# EAGLE board Lynx Keyboard 20240103 (EAGLE 7.5.0)
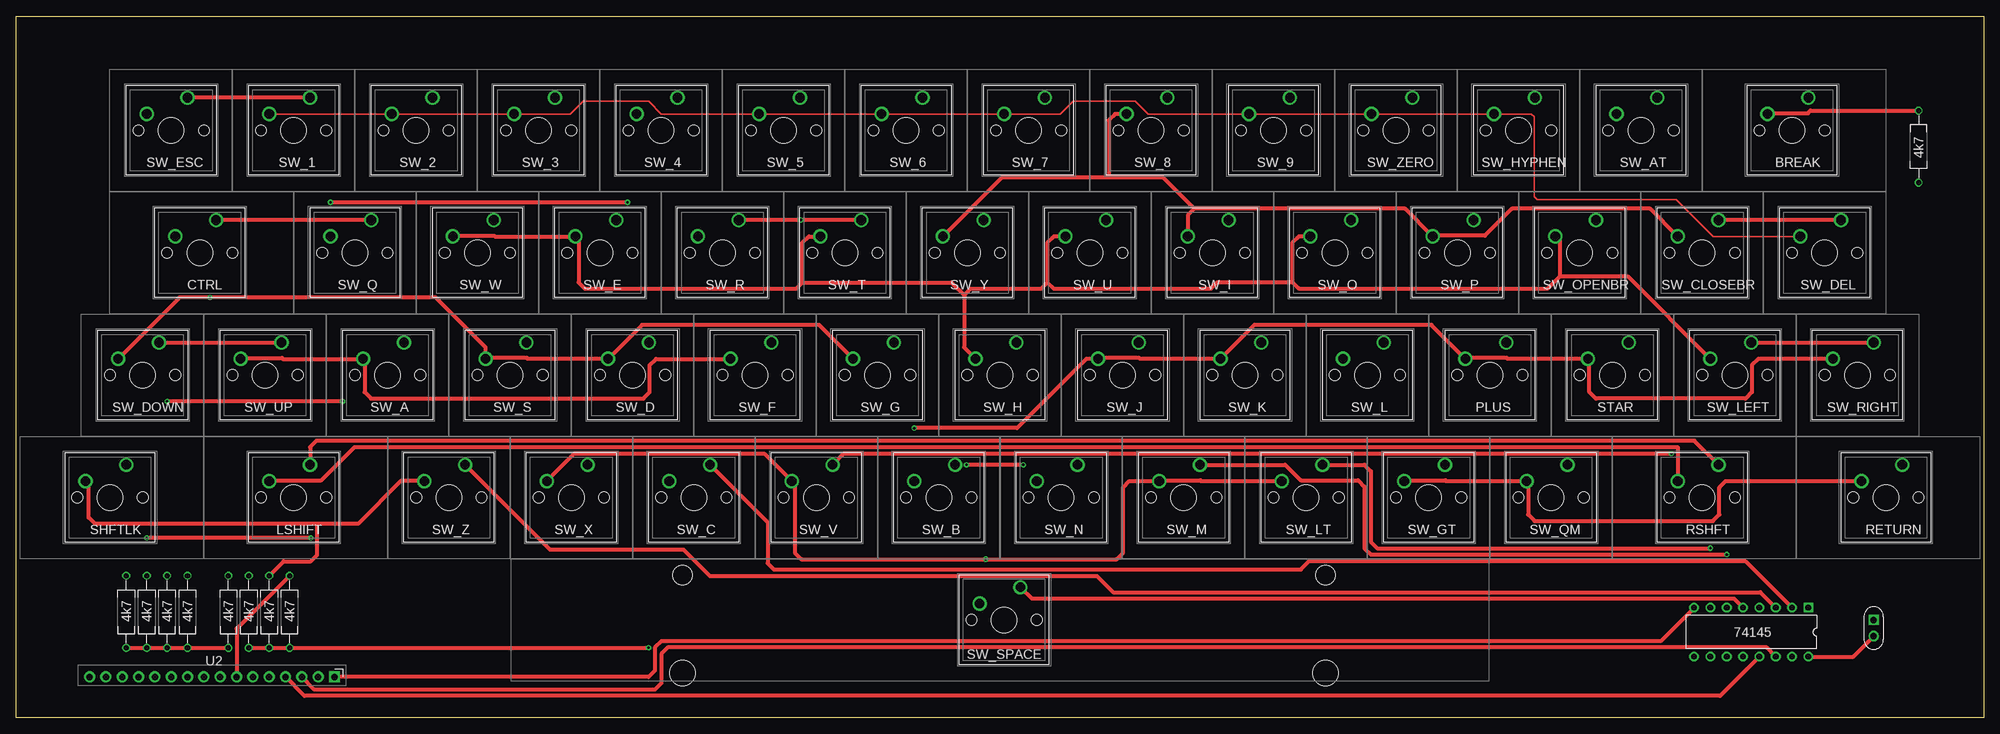
[diagram p0: board, top side]
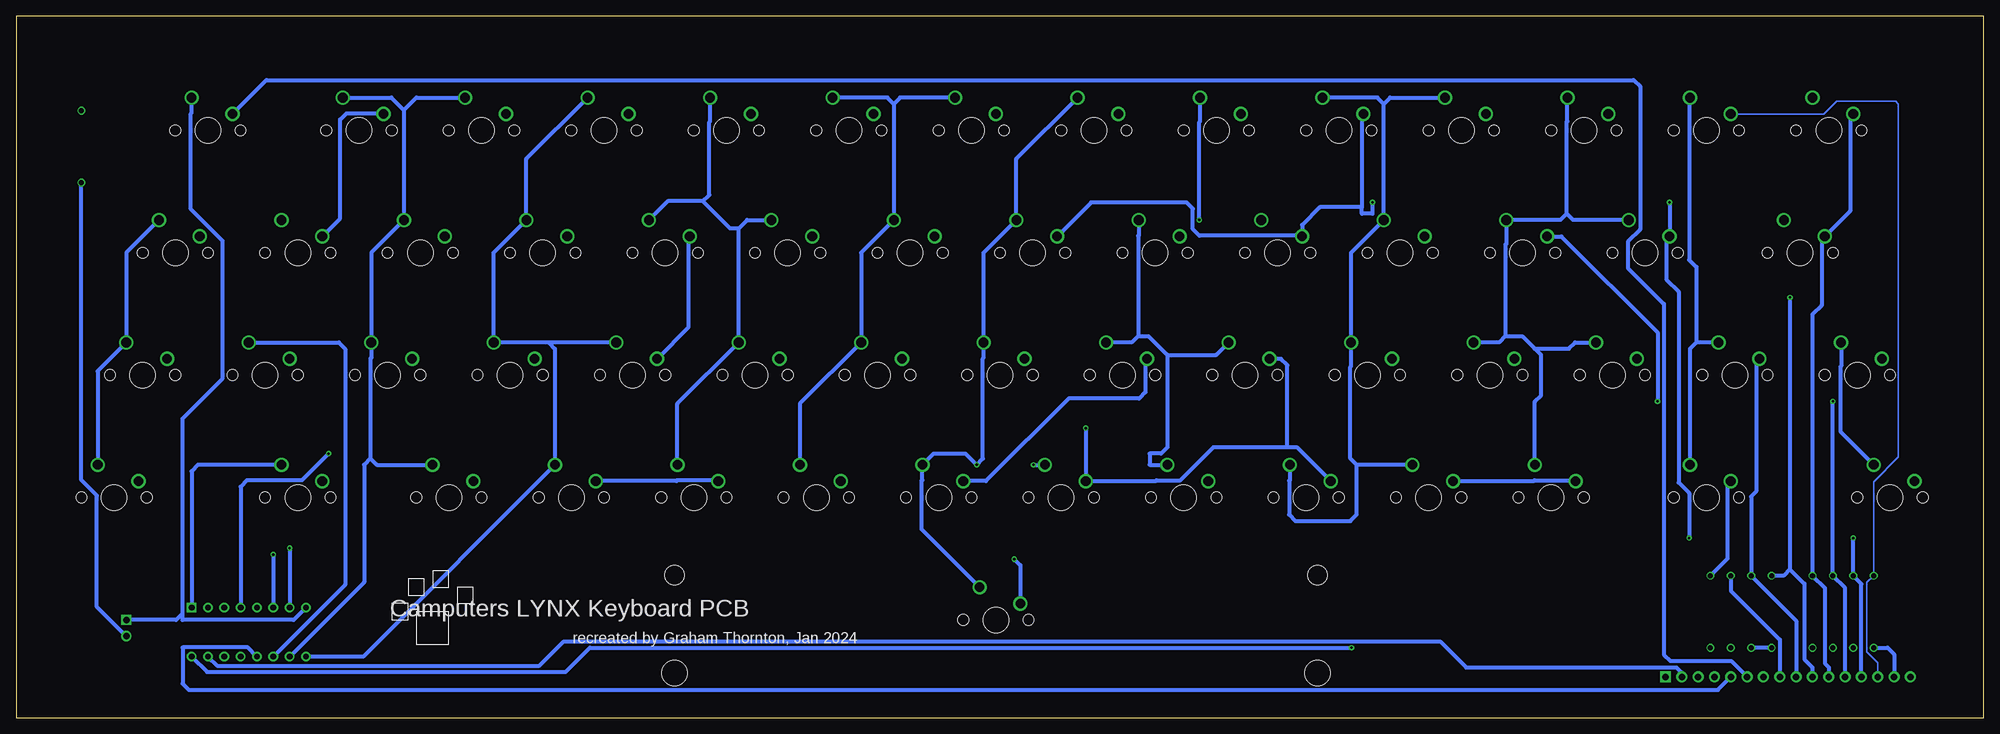
[diagram p1: board, bottom side, seen from below]

Size 306.07 x 109.22 mm. Coordinates in mm from the lower left corner, seen from the top.
Outline: 0,109.22 306.07,109.22 306.07,0 0,0 0,109.22
Copper layers (1*16): F.Cu 0.035mm / dielectric 1.5mm / B.Cu 0.035mm
Design rules "default *": minimum track width 10mil, minimum drill 0.61mm, track to track 8mil, track to pad 8mil, pad to pad 8mil, via to via 8mil, smd to smd 8mil, copper to edge 40mil, drill to drill 8mil, minimum pad ring 0mil, minimum via ring 8mil, stop-mask expansion 2mil, vias tented up to drill 19mil, thermal gap 10mil
Net classes: 0 Default: width 0.66 mm, clearance 0.33 mm, clearance 0.33 mm to class 1; 1 Default KiCad: width 0.25 mm, clearance 0.2 mm, clearance 0.2 mm to class 0

## Footprints (pad centres in the part's own frame; a part is rotated, then mirrored left to right if it is on the bottom)
DIP-16 = drill 0.9 pad 1.5 square: 1 -3.81,8.89 | drill 0.9 pad 1.5: 2 -3.81,6.35; 3 -3.81,3.81; 4 -3.81,1.27; 5 -3.81,-1.27; 6 -3.81,-3.81; 7 -3.81,-6.35; 8 -3.81,-8.89; 9 3.81,-8.89; 10 3.81,-6.35; 11 3.81,-3.81; 12 3.81,-1.27; 13 3.81,1.27; 14 3.81,3.81; 15 3.81,6.35; 16 3.81,8.89
P1 = drill 1.5 pad 2.2: 1 2.222,5.08; 2 -4.128,2.54 | hole 4: -0.317,0 | hole 1.7: -5.398,0; 4.763,0
CAP-2.54/6.6x3 = drill 1 pad 1.6 square: 1 -1.27,0 | drill 1 pad 1.6: 2 1.27,0
P0 = drill 1.5 pad 2.2: 1 0,0; 2 -6.35,-2.54 | hole 4: -2.54,-5.08 | hole 1.7: -7.62,-5.08; 2.54,-5.08
RESAD1120W55L680D260 = drill 0.8 pad 1.2: 1 -5.6,0; 2 5.6,0
P53 = drill 1.5 pad 2.2: 1 3.175,5.438; 2 -3.175,2.898 | hole 4: 0.635,0.357; 50.635,-7.883; -49.365,-7.883 | hole 1.7: -4.445,0.357; 5.715,0.357 | hole 3.05: -49.365,7.357; 50.635,7.357
P68 = drill 1 pad 1.7 square: 1 19.05,-0.212 | drill 1 pad 1.7: 2 16.51,-0.212; 3 13.97,-0.212; 4 11.43,-0.212; 5 8.89,-0.212; 6 6.35,-0.212; 7 3.81,-0.212; 8 1.27,-0.212; 9 -1.27,-0.212; 10 -3.81,-0.212; 11 -6.35,-0.212; 12 -8.89,-0.212; 13 -11.43,-0.212; 14 -13.97,-0.212; 15 -16.51,-0.212; 16 -19.05,-0.212

## Placement (x,y rotation side)
74145  DM74145N  [DIP-16]  269.88,13.34 270 top
BREAK  DEV_BREAK  [P1]  276.54,91.44 0 top
C1  CAP  [CAP-2.54/6.6x3]  288.93,13.97 270 top
CTRL  DEV_CTRL  [P1]  28.89,72.39 0 top
LSHIFT  DEV_LSHIFT  [P1]  43.5,34.29 0 top
PLUS  SW_Push_LED  [P0]  231.78,58.42 0 top
R1  4k7  [RESAD1120W55L680D260]  295.91,88.9 270 top
R2  4k7  [RESAD1120W55L680D260]  20.32,16.51 90 top
R3  4k7  [RESAD1120W55L680D260]  23.5,16.51 90 top
R4  4k7  [RESAD1120W55L680D260]  26.67,16.51 90 top
R5  4k7  [RESAD1120W55L680D260]  33.02,16.51 90 top
R6  4k7  [RESAD1120W55L680D260]  36.2,16.51 90 top
R7  4k7  [RESAD1120W55L680D260]  39.37,16.51 90 top
R8  4k7  [RESAD1120W55L680D260]  42.55,16.51 90 top
R11  4k7  [RESAD1120W55L680D260]  17.14,16.51 90 top
RETURN  DEV_RETURN  [P1]  291.15,34.29 0 top
RSHFT  DEV_RSHFT  [P1]  262.57,34.29 0 top
SHFTLK  DEV_SHFTLK  [P1]  14.92,34.29 0 top
STAR  SW_Push_LED  [P0]  250.82,58.42 0 top
SW_1  SW_Push_LED  [P0]  45.72,96.52 0 top
SW_2  SW_Push_LED  [P0]  64.77,96.52 0 top
SW_3  SW_Push_LED  [P0]  83.82,96.52 0 top
SW_4  SW_Push_LED  [P0]  102.87,96.52 0 top
SW_5  SW_Push_LED  [P0]  121.92,96.52 0 top
SW_6  SW_Push_LED  [P0]  140.97,96.52 0 top
SW_7  SW_Push_LED  [P0]  160.02,96.52 0 top
SW_8  SW_Push_LED  [P0]  179.07,96.52 0 top
SW_9  SW_Push_LED  [P0]  198.12,96.52 0 top
SW_A  SW_Push_LED  [P0]  60.33,58.42 0 top
SW_AT  SW_Push_LED  [P0]  255.27,96.52 0 top
SW_B  SW_Push_LED  [P0]  146.05,39.37 0 top
SW_C  SW_Push_LED  [P0]  107.95,39.37 0 top
SW_CLOSEBR  SW_Push_LED  [P0]  264.8,77.47 0 top
SW_D  SW_Push_LED  [P0]  98.42,58.42 0 top
SW_DEL  SW_Push_LED  [P0]  283.85,77.47 0 top
SW_DOWN  SW_Push_LED  [P0]  22.23,58.42 0 top
SW_E  SW_Push_LED  [P0]  93.34,77.47 0 top
SW_ESC  SW_Push_LED  [P0]  26.67,96.52 0 top
SW_F  SW_Push_LED  [P0]  117.47,58.42 0 top
SW_G  SW_Push_LED  [P0]  136.53,58.42 0 top
SW_GT  SW_Push_LED  [P0]  222.25,39.37 0 top
SW_H  SW_Push_LED  [P0]  155.57,58.42 0 top
SW_HYPHEN  SW_Push_LED  [P0]  236.22,96.52 0 top
SW_I  SW_Push_LED  [P0]  188.59,77.47 0 top
SW_J  SW_Push_LED  [P0]  174.62,58.42 0 top
SW_K  SW_Push_LED  [P0]  193.68,58.42 0 top
SW_L  SW_Push_LED  [P0]  212.72,58.42 0 top
SW_LEFT  SW_Push_LED  [P0]  269.88,58.42 0 top
SW_LT  SW_Push_LED  [P0]  203.2,39.37 0 top
SW_M  SW_Push_LED  [P0]  184.15,39.37 0 top
SW_N  SW_Push_LED  [P0]  165.1,39.37 0 top
SW_O  SW_Push_LED  [P0]  207.65,77.47 0 top
SW_OPENBR  SW_Push_LED  [P0]  245.75,77.47 0 top
SW_P  SW_Push_LED  [P0]  226.69,77.47 0 top
SW_Q  SW_Push_LED  [P0]  55.24,77.47 0 top
SW_QM  SW_Push_LED  [P0]  241.3,39.37 0 top
SW_R  SW_Push_LED  [P0]  112.39,77.47 0 top
SW_RIGHT  SW_Push_LED  [P0]  288.93,58.42 0 top
SW_S  SW_Push_LED  [P0]  79.38,58.42 0 top
SW_SPACE  DEV_SW_SPACE  [P53]  153.03,14.88 0 top
SW_T  SW_Push_LED  [P0]  131.44,77.47 0 top
SW_U  SW_Push_LED  [P0]  169.54,77.47 0 top
SW_UP  SW_Push_LED  [P0]  41.27,58.42 0 top
SW_V  SW_Push_LED  [P0]  127,39.37 0 top
SW_W  SW_Push_LED  [P0]  74.3,77.47 0 top
SW_X  SW_Push_LED  [P0]  88.9,39.37 0 top
SW_Y  SW_Push_LED  [P0]  150.5,77.47 0 top
SW_Z  SW_Push_LED  [P0]  69.85,39.37 0 top
SW_ZERO  SW_Push_LED  [P0]  217.17,96.52 0 top
U2  DEV_U2  [P68]  30.48,6.56 0 top

## Library data of the parts
74145 = common; DATASHEET: http://datasheets.diptrace.com/fairchild/DM74145.pdf; MANUFACTURER: Fairchild
BREAK C1 CTRL LSHIFT PLUS RETURN RSHFT SHFTLK STAR SW_1-SW_9 SW_A SW_AT SW_B SW_C SW_CLOSEBR SW_D SW_DEL SW_DOWN SW_E SW_ESC SW_F SW_G SW_GT SW_H SW_HYPHEN SW_I SW_J SW_K SW_L SW_LEFT SW_LT SW_M SW_N SW_O SW_OPENBR SW_P SW_Q SW_QM SW_R SW_RIGHT SW_S SW_SPACE SW_T SW_U SW_UP SW_V SW_W SW_X SW_Y SW_Z SW_ZERO U2 = common
R1-R8 R11 = common; DATASHEET: http://datasheets.diptrace.com/yageo/cfr.pdf; MANUFACTURER: Yageo; PART_NUMBER_(DIGI-KEY): 1.0KQBK-ND; UNIQUE_NAME: YAGEO_CFR-25

## Nets
key_pin_9 [Default KiCad]: R11.2 SW_1.2 SW_2.2 SW_3.2 SW_5.2 SW_6.2 SW_7.2 SW_9.2 SW_DEL.2 SW_HYPHEN.2 SW_ZERO.2 U2.14
Net_0: 74145.5 SW_6.1 SW_B.1 SW_H.1 SW_N.1 SW_SPACE.1 SW_Y.1
Net_2: R2.2 SW_4.2 SW_8.2 SW_AT.2 SW_CLOSEBR.2 SW_I.2 SW_P.2 SW_Q.2 SW_R.2 SW_Y.2 U2.13
Net_3: 74145.8 BREAK.1 C1.1 U2.1
Net_4: BREAK.2 R1.1 U2.6
Net_5: 74145.15 U2.2
Net_6: 74145.14 U2.3
Net_7: 74145.13 U2.4
Net_8: 74145.12 U2.5
Net_9: LSHIFT.2 R8.2 RSHFT.2 U2.7
Net_10: 74145.1 LSHIFT.1 RSHFT.1 SHFTLK.1 SW_1.1 SW_DOWN.1 SW_ESC.1 SW_UP.1
Net_11: 74145.2 SW_3.1 SW_4.1 SW_C.1 SW_D.1 SW_E.1 SW_X.1
Net_12: 74145.3 CTRL.1 SW_2.1 SW_A.1 SW_Q.1 SW_S.1 SW_W.1 SW_Z.1
Net_13: 74145.4 SW_5.1 SW_F.1 SW_G.1 SW_R.1 SW_T.1 SW_V.1
Net_14: 74145.16 C1.2 R1.2 R2.1 R3.1 R4.1 R5.1 R6.1 R7.1 R8.1 R11.1 U2.15
Net_15: 74145.6 SW_7.1 SW_8.1 SW_J.1 SW_M.1 SW_U.1
Net_16: 74145.7 SW_9.1 SW_I.1 SW_K.1 SW_LT.1 SW_O.1
Net_17: 74145.9 PLUS.1 SW_GT.1 SW_L.1 SW_P.1 SW_ZERO.1
Net_18: 74145.10 STAR.1 SW_AT.1 SW_HYPHEN.1 SW_OPENBR.1 SW_QM.1
Net_19: 74145.11 RETURN.1 SW_CLOSEBR.1 SW_DEL.1 SW_LEFT.1 SW_RIGHT.1
Net_20: R7.2 RETURN.2 SHFTLK.2 SW_GT.2 SW_LT.2 SW_M.2 SW_QM.2 SW_SPACE.2 SW_V.2 SW_X.2 SW_Z.2 U2.8
Net_21: PLUS.2 R6.2 STAR.2 SW_A.2 SW_B.2 SW_C.2 SW_F.2 SW_J.2 SW_K.2 SW_RIGHT.2 SW_UP.2 U2.9
Net_22: R3.2 SW_E.2 SW_H.2 SW_L.2 SW_LEFT.2 SW_O.2 SW_OPENBR.2 SW_T.2 SW_U.2 SW_W.2 U2.12
Net_23: CTRL.2 R4.2 SW_ESC.2 U2.11
Net_24: R5.2 SW_D.2 SW_DOWN.2 SW_G.2 SW_N.2 SW_S.2 U2.10

## Tracks (layer width: path | path; a pad name or v marks a point on that pad's centre or on a via)
key_pin_9
  F.Cu 0.25: SW_1.2 SW_2.2 SW_3.2 86.21,93.98 88.22,95.98 98.38,95.98 100.38,93.98 SW_5.2 SW_6.2 SW_7.2 162.41,93.98 164.42,95.98 174.1,95.98 176.11,93.98 SW_9.2 SW_ZERO.2 SW_HYPHEN.2 235.69,93.98 236.13,93.53 236.13,81.1 236.59,80.65 258.22,80.65 263.94,74.93 SW_DEL.2
  B.Cu 0.25: SW_1.2 24.92,93.98 22.91,95.98 13.75,95.98 13.3,95.53 13.3,40.59 17.14,36.74 R11.2 18.2,21.05 18.2,10.25 16.51,8.56 U2.14
Net_0  (via drill 0.4 pad 0.6)
  F.Cu 0.66: SW_SPACE.1 157.97,18.55 267.19,18.55 74145.5 | v156.66,39.37 v147.81,39.37
  B.Cu 0.66: SW_SPACE.1 165.22,29.33 165.22,36.89 165.1,37.01 SW_N.1 163.34,41.13 158.42,41.13 v156.66,39.37 155.69,40.33 155.69,55.94 155.57,56.06 SW_H.1 155.57,72.39 SW_Y.1 150.5,87 SW_6.1 | v147.81,39.37 SW_B.1
Net_2  (via drill 0.4 pad 0.6)
  F.Cu 0.66: SW_CLOSEBR.2 254.15,79.23 232.63,79.23 228.46,75.05 220.47,75.05 SW_P.2 | SW_P.2 216.04,79.23 183.24,79.23 | 183.24,79.23 182.25,78.24 SW_I.2 | SW_8.2 170.93,93.98 169.94,92.99 169.94,84.15 | 169.94,84.15 178.31,84.15 183.24,79.23 | v95.11,80.22 v48.9,80.22 | SW_Y.2 153.37,84.15 169.94,84.15 | SW_P.2 | v45.84,27.99 v20.32,27.99
  B.Cu 0.66: SW_CLOSEBR.2 255.66,77.71 255.66,93.11 254.67,94.1 249.04,94.1 SW_AT.2 | v48.9,80.22 SW_Q.2 | U2.13 19.05,20.84 R2.2 v20.32,27.99 | SW_4.2 | SW_4.2 96.76,93.74 96.76,79.45 | 96.76,79.45 103.28,79.45 106.05,76.69 SW_R.2 | SW_AT.2 | SW_Q.2 49.39,74.44 49.39,68.24 47.48,66.33 47.48,36.62 45.84,34.98 v45.84,27.99 | SW_Q.2 | SW_R.2 106.17,75.05 122.04,75.05 123.03,76.04 123.03,79.23 124.02,80.22 138.85,80.22 SW_Y.2 | SW_R.2 | v95.11,80.22 95.11,78.46 96.76,78.46 96.76,79.45
Net_3
  F.Cu 0.66: 74145.8 255.77,11.93 100.35,11.93 99.36,10.94 99.36,7.34 98.37,6.35 U2.1
  B.Cu 0.66: 74145.8 262.89,15.24 280.18,15.24 280.18,16.23 | 280.18,16.23 280.18,46.56 273.93,52.81 273.93,74.21 278.88,79.17 278.88,94.04 278.76,94.16 BREAK.1 | 280.18,16.23 281.17,15.24 C1.1
Net_4
  F.Cu 0.66: BREAK.2 | BREAK.2 272.54,94.1 278.69,94.1 279.08,94.5 R1.1
  B.Cu 0.66: BREAK.2 267.12,99.27 54.48,99.27 53.48,98.28 53.48,75.99 55.37,74.11 55.37,70.02 49.77,64.43 49.77,9.84 48.78,8.85 39.33,8.85 U2.6
Net_5
  B.Cu 0.66: 74145.15 274.81,8.12 224.66,8.12 220.88,11.9 84.57,11.9 80.53,7.86 47.84,7.86 46.99,7.01 U2.2 | U2.2
Net_6
  F.Cu 0.66: 74145.14 272.27,10.94 101.34,10.94 100.35,9.95 100.35,5.38 99.36,4.39 46.41,4.39 U2.3
Net_7
  F.Cu 0.66: 74145.13 265.02,3.4 44.86,3.4 U2.4
Net_8
  B.Cu 0.66: 74145.12 270.01,10.94 280.18,10.94 280.18,5.33 279.19,4.34 41.38,4.34 U2.5
Net_9
  F.Cu 0.66: LSHIFT.2 | R8.2 34.29,13.86 U2.7 | LSHIFT.2 39.49,36.95 47.48,36.95 52.65,42.12 258.44,42.12 RSHFT.2
  B.Cu 0.66: R8.2 39.87,24.79 39.87,36.34 LSHIFT.2 | LSHIFT.2
Net_10
  F.Cu 0.66: RSHFT.1 261.05,43.11 46.71,43.11 45.72,42.12 LSHIFT.1 | SW_1.1 SW_ESC.1 | SW_DOWN.1 SW_UP.1
  B.Cu 0.66: RSHFT.1 277.77,39.37 278.76,38.38 74145.1 | SW_DOWN.1 22.23,54.74 22.34,54.62 22.34,44.57 SHFTLK.1 | SW_1.1 | SW_1.1 45.84,96.4 45.84,71.28 44.73,70.17 44.73,58.42 | 44.73,58.42 45.72,57.43 LSHIFT.1 | SW_UP.1 44.73,58.42
Net_11
  F.Cu 0.66: SW_C.1 116.88,30.44 116.88,24.06 117.87,23.07 199.82,23.07 201.17,24.43 268.94,24.43 74145.2
  B.Cu 0.66: SW_X.1 97.56,39.37 | 97.56,39.37 98.55,40.36 98.55,54.62 98.42,54.74 SW_D.1 98.42,72.39 SW_E.1 93.34,95.53 | 93.34,95.53 92.35,96.52 SW_3.1 | SW_C.1 107.95,37.01 108.07,36.89 108.07,31.63 107.08,30.64 98.55,30.64 97.56,31.63 97.56,39.37 | 93.34,95.53 94.34,96.52 SW_4.1
Net_12
  F.Cu 0.66: SW_Z.1 83.02,26.2 103.79,26.2 107.92,22.08 168.1,22.08 170.64,19.55 271.28,19.55 74145.3 | SW_Q.1 CTRL.1
  B.Cu 0.66: SW_Z.1 69.85,49.21 68.89,50.17 68.89,56.47 69.88,57.46 | 69.88,57.46 64.55,57.46 63.59,58.42 SW_A.1 | SW_Q.1 63.9,77.47 64.89,78.46 | 64.89,78.46 65.88,77.47 SW_W.1 74.3,73.79 74.42,73.67 74.42,59.41 | 74.42,59.41 71.83,59.41 69.88,57.46 | 64.89,78.46 64.89,92.72 64.77,92.84 SW_2.1 | 74.42,59.41 75.41,58.42 SW_S.1
Net_13  (via drill 0.4 pad 0.6)
  F.Cu 0.66: SW_T.1 v122.04,77.47 SW_R.1 | SW_V.1 128.76,41.13 v257.45,41.13
  B.Cu 0.66: SW_T.1 131.44,75.11 131.56,74.99 131.56,59.41 | 131.56,59.41 129.94,59.41 127,56.47 | 127,56.47 119.43,56.47 SW_F.1 | v122.04,77.47 122.04,92.72 121.92,92.84 SW_5.1 | 127,56.47 127,42.09 127.96,41.13 129.75,41.13 129.75,39.37 SW_V.1 | v257.45,41.13 261.63,36.95 270.15,36.95 271.14,35.96 74145.4 | 131.56,59.41 132.56,58.42 SW_G.1
Net_14  (via drill 0.4 pad 0.6)
  F.Cu 0.66: 74145.16 285.75,9.53 C1.2 | R11.1 R2.1 R3.1 R4.1 R5.1 | R6.1 R7.1 R8.1 v98.37,10.91
  B.Cu 0.66: C1.2 293.49,17.27 293.49,34.59 295.91,37.01 R1.2 | R11.1 14.96,10.91 13.97,9.92 U2.15 | R5.1 R6.1 | 74145.16 276.36,7.12 220.61,7.12 216.83,10.91 v98.37,10.91
Net_15  (via drill 0.4 pad 0.6)
  F.Cu 0.66: SW_M.1 197.4,39.37 199.82,36.95 208.73,36.95 209.72,35.96 209.72,26.41 210.71,25.42 v266.06,25.42
  B.Cu 0.66: SW_7.1 168.55,96.52 169.54,95.53 | 169.54,95.53 SW_U.1 174.62,72.39 SW_J.1 184.15,48.9 SW_M.1 | 169.54,95.53 170.54,96.52 SW_8.1 | v266.06,25.42 74145.6
Net_16  (via drill 0.4 pad 0.6)
  F.Cu 0.66: SW_LT.1 209.72,39.37 210.71,38.38 210.71,27.4 211.7,26.41 v263.52,26.41
  B.Cu 0.66: SW_LT.1 203.2,48.9 SW_K.1 193.68,76.15 | 193.68,76.15 195,76.15 199.23,80.38 | 199.23,80.38 204.73,80.38 SW_O.1 | 193.68,76.15 192.35,77.47 SW_I.1 | v263.52,26.41 74145.7 | 199.23,80.38 198.24,81.37 198.24,92.72 198.12,92.84 SW_9.1
Net_17
  B.Cu 0.66: SW_L.1 223.24,58.42 | 223.24,58.42 222.25,57.43 SW_GT.1 252.09,9.53 74145.9 | 223.24,58.42 228.03,58.42 | 228.03,58.42 | 228.03,58.42 PLUS.1 231.78,72.39 SW_P.1 226.69,87 SW_ZERO.1
Net_18
  B.Cu 0.66: SW_AT.1 247.7,96.52 245.75,94.57 | 245.75,94.57 SW_OPENBR.1 250.82,72.39 STAR.1 250.82,56.06 250.94,55.94 250.94,40.36 | 245.75,94.57 243.79,96.52 SW_HYPHEN.1 | 250.94,40.36 251.94,39.37 251.94,21.11 74145.10 | 250.94,40.36 249.96,39.37 SW_QM.1
Net_19
  F.Cu 0.66: SW_DEL.1 SW_CLOSEBR.1 | SW_LEFT.1 SW_RIGHT.1
  B.Cu 0.66: SW_LEFT.1 255.87,58.42 254.88,57.43 254.88,20.71 74145.11 | SW_DEL.1 288.93,72.39 SW_RIGHT.1 293.37,53.98 RETURN.1
Net_20  (via drill 0.4 pad 0.6)
  F.Cu 0.66: SW_X.2 86.85,41.13 116.35,41.13 SW_V.2 | SW_Z.2 59.85,36.83 53.21,30.19 46.83,30.19 | 46.83,30.19 12.28,30.19 11.29,31.18 11.29,36.34 SHFTLK.2 | R7.2 41.62,24.36 45.84,24.36 46.83,25.35 46.83,30.19 | SW_GT.2 | SW_M.2 177.92,36.95 184.21,36.95 184.33,36.83 SW_LT.2 | SW_M.2 | SW_M.2 173.17,36.83 172.18,35.84 172.18,25.68 171.19,24.69 v150.82,24.69 122.14,24.69 121.14,25.68 121.14,36.34 SW_V.2 | SW_V.2 | SHFTLK.2 | SW_QM.2 235.19,36.59 235.19,31.63 236.18,30.64 263.93,30.64 264.92,31.63 264.92,35.84 265.91,36.83 RETURN.2 | SW_QM.2 | SW_GT.2 216.02,36.95 222.31,36.95 222.43,36.83 SW_QM.2
  B.Cu 0.66: R7.2 39.37,19.79 31.75,12.17 U2.8 | SW_LT.2 | SW_X.2 70.03,36.83 69.91,36.95 63.62,36.95 SW_Z.2 | v150.82,24.69 149.86,23.73 SW_SPACE.2 | SW_LT.2 196.97,36.95 203.26,36.95 203.38,36.83 SW_GT.2 | SW_Z.2
Net_21  (via drill 0.4 pad 0.6)
  F.Cu 0.66: SW_UP.2 | SW_RIGHT.2 270.99,55.88 270,54.89 270,50.68 269,49.69 245.71,49.69 244.72,50.68 244.72,55.64 STAR.2 | SW_A.2 54.22,55.64 54.22,50.68 55.21,49.69 97.56,49.69 98.55,50.68 98.55,54.89 99.54,55.88 SW_F.2 | SW_A.2 | SW_UP.2 35.05,56 41.34,56 41.46,55.88 SW_A.2 | SW_J.2 166.48,55.88 155.69,45.09 v139.7,45.09 | SW_J.2 | SW_J.2 168.4,56 174.69,56 174.81,55.88 SW_K.2 192.62,61.17 220.13,61.17 PLUS.2 | PLUS.2 | STAR.2 231.96,55.88 231.84,56 225.54,56 PLUS.2 | STAR.2
  B.Cu 0.66: v139.7,45.09 SW_B.2 128.82,36.83 128.7,36.95 125,36.95 119.83,42.12 108.34,42.12 | SW_UP.2 | 108.34,42.12 108.34,54.89 109.33,55.88 SW_F.2 | 108.34,42.12 106.89,42.12 SW_C.2 | U2.9 29.21,15.12 R6.2 36.2,34.42 35.42,35.2 35.42,55.38 SW_UP.2
Net_22  (via drill 0.4 pad 0.6)
  F.Cu 0.66: SW_W.2 | SW_U.2 161.41,74.93 160.41,73.94 160.41,67.78 | 160.41,67.78 161.41,66.79 185.82,66.79 186.84,67.81 198.51,67.81 | 198.51,67.81 199.5,66.82 238.24,66.82 240.16,68.74 | 240.16,68.74 250.67,68.74 SW_LEFT.2 | SW_E.2 87.49,74.44 87.49,67.78 88.48,66.79 121.32,66.79 122.31,67.78 | 122.31,67.78 122.31,73.94 123.31,74.93 SW_T.2 | SW_O.2 199.5,74.93 198.51,73.94 198.51,67.81 | 240.16,68.74 240.16,74.16 SW_OPENBR.2 | 122.31,67.78 145.48,67.78 147.47,65.8 | 147.47,65.8 147.47,57.64 SW_H.2 | 147.47,65.8 148.46,66.79 159.42,66.79 160.41,67.78 | SW_E.2 | SW_W.2 68.06,75.05 74.36,75.05 74.48,74.93 SW_E.2 | v50.76,49.25 v23.5,49.25 | SW_OPENBR.2
  B.Cu 0.66: SW_O.2 | SW_W.2 65.72,74.93 50.76,59.97 v50.76,49.25 | U2.12 21.59,20.2 R3.2 v23.5,49.25 | SW_O.2 201.53,74.69 201.53,60.72 SW_L.2
Net_23
  B.Cu 0.66: SW_ESC.2 | U2.11 24.13,7.86 24.75,8.49 24.75,20.2 R4.2 26.67,62.77 25.26,64.18 25.26,74.44 CTRL.2 | CTRL.2 | SW_ESC.2 20.82,93.48 20.82,78.88 CTRL.2
Net_24  (via drill 0.4 pad 0.6)
  F.Cu 0.66: SW_G.2 124.88,61.17 97.37,61.17 SW_D.2 79.56,55.88 79.44,56 73.14,56 SW_S.2 | SW_DOWN.2 25.42,65.43 v30.16,65.43 65.24,65.43 73.03,57.64 SW_S.2 | SW_S.2
  B.Cu 0.66: SW_G.2 | v30.16,65.43 30.16,23.1 | 30.16,23.1 27.93,20.87 27.93,9.12 26.67,7.86 U2.10 | 30.16,23.1 31.15,22.11 R5.2 | SW_G.2 130.41,55.64 130.41,50.68 131.41,49.69 142.37,49.69 155.23,36.83 SW_N.2

## Text on the board
tPlace: 4k7 | SW_ESC | SW_1 | SW_2 | SW_3 | SW_4 | SW_5 | SW_6 | SW_7 | SW_8 | SW_9 | SW_ZERO | SW_HYPHEN | SW_AT | BREAK | CTRL | SW_Q | SW_W | SW_E | SW_R | SW_T | SW_Y | SW_U | SW_I | SW_O | SW_P | SW_OPENBR | SW_CLOSEBR | SW_DEL | SW_DOWN | SW_UP | SW_A | SW_S | SW_D | SW_F | SW_G | SW_H | SW_J | SW_K | SW_L | PLUS | STAR | SW_LEFT | SW_RIGHT | SHFTLK | LSHIFT | SW_Z | SW_X | SW_C | SW_V | SW_B | SW_N | SW_M | SW_LT | SW_GT | SW_QM | RSHFT | RETURN | 4k7 | 4k7 | 4k7 | 4k7 | 4k7 | 4k7 | 4k7 | 4k7 | 74145 | SW_SPACE | U2
bPlace: Camputers LYNX Keyboard PCB | recreated by Graham Thornton, Jan 2024